# Altium PCB PCB.PcbDoc
Units mm, origin at the board's own origin, x right, y up, seen from the top; angles counter-clockwise.
Board outline 14.76 x 69.62 mm, 2 copper layers (Top Layer, Bottom Layer), stack 0.325 mm thick; 12 components, 11 nets, 44 pads, 0 vias.
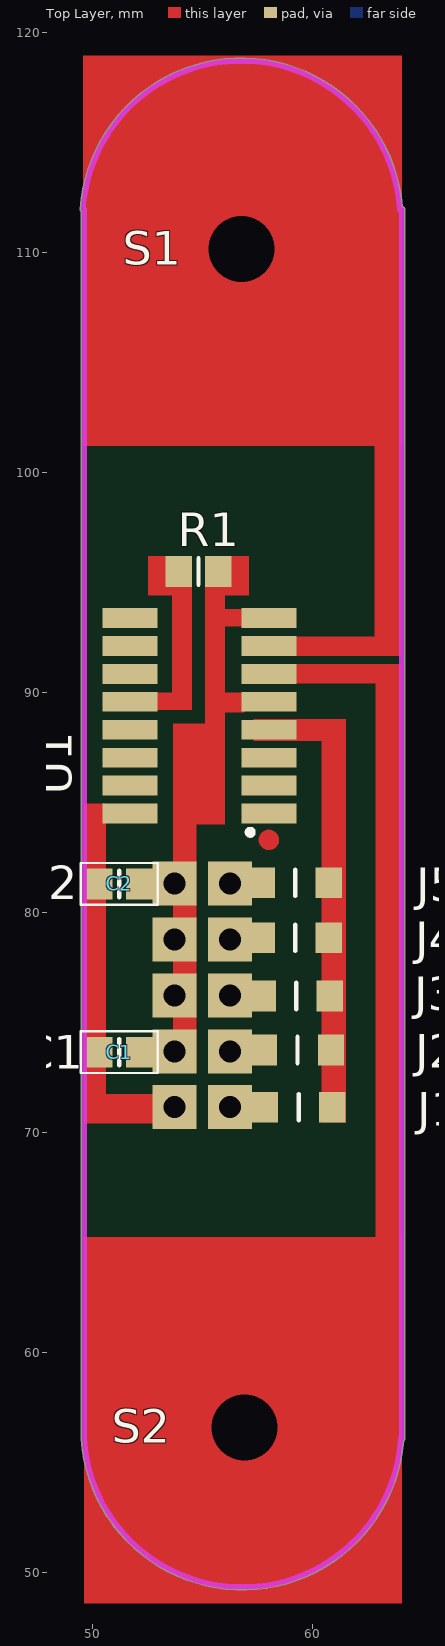
[diagram p0: Top Layer view]
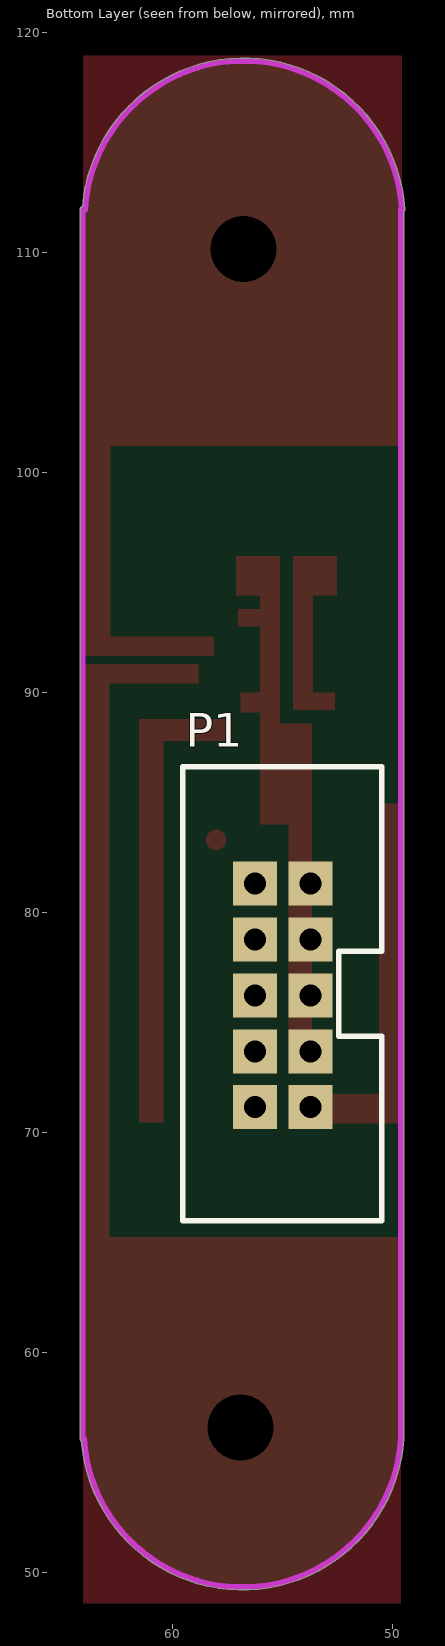
[diagram p1: Bottom Layer view, seen from below]

## Layer stack, top to bottom
Top Layer: signal copper 0.0356
Dielectric 1: core 0.254, FR-4, Dk 4.2
Bottom Layer: signal copper 0.0356

## Board outline
49.473,56.092 49.473,111.855 cw(c49.549,111.957) 49.422,111.965 cw(c56.749,111.491) 64.069,112.076 cw(c64.05,111.95) 64.177,111.95 64.177,56.091 cw(c64.05,56.091) 64.121,55.985 cw(c56.8,56.55) 49.473,56.076 cw(c49.6,56.084)

## Design rules (kind name [scope] priority, off if disabled: settings)
Clearance [All] p1: gap=0.254
PolygonConnect [All] p1: connectstyle=Relief reliefconductorwidth=0.254 reliefentries=4 polygonreliefangle="90 Angle" airgapwidth=0.254
RoutingVias [All] p1: holewidth=0.711 width=1.27 viastyle="Through Hole" minholewidth=0.711 minwidth=1.27 maxholewidth=0.711 maxwidth=1.27
SolderMaskExpansion [All] p1: expansion=0.102
Width [All] p1: maxlimit=0.254 minlimit=0.254 preferedwidth=0.254
30 further rules are at their usual default settings.

## Classes and differential pairs
component class CD4046: C1 C2 R1 U1
component class Top: J1 J2 J3 J4 J5 P1 S1 S2

## Components (designator, comment, footprint, x,y, rotation, side; value= is the part's Value field where it differs from the comment)
C1 "100nF" "C 0805 / 2012" 51.2,73.65 r0 top
C2 "1uF" "C 0805 / 2012" 51.2,81.3 r0 top
J1 "" "R 0805 / 2012 wide" 59.35,71.15 r0 top
J2 "" "R 0805 / 2012 wide" 59.3,73.75 r0 top
J3 "" "R 0805 / 2012 wide" 59.25,76.2 r0 top
J4 "" "R 0805 / 2012 wide" 59.2,78.85 r0 top
J5 "" "R 0805 / 2012 wide" 59.2,81.35 r0 top
P1 "Header 2x5" "Header 2x5 IDC-10S" 53.7,71.15 r0 bottom
R1 "190k / 170k / 150k / 130k / 110k" "R 0805 / 2012" 54.8,95.5 r0 top
S1 "Screw M3" "SCREW M3" 56.75,110.15 r0 top
S2 "Screw M3" "SCREW M3" 56.9,56.6 r0 top
U1 "CD4046" SOIC-16 54.8,86.4 r180 top

## Footprints (in the part's own frame and the unit in brackets; to place one, negate y for a bottom-side part, rotate by r counter-clockwise, add the part's x,y. Pads: shape width x height; smd on the part's side, far side on the other; paste and mask are expansions set on the pad)
"C 0805 / 2012" [mm] "Capacitor 0805 / 2012 (2.0 x 1.2 mm)"
  rect 1.2x1.4 smd: 1(-0.9,0) 2(0.9,0)
  silkscreen extent -1.75,-0.95 1.75,0.95, body extent -1,-0.62 1,0.62, height 0.78
"Header 2x5 IDC-10S" [mm]
  rect 2x2 hole 1: 1(0,0) 2(2.54,0) 3(0,-2.54) 4(2.54,-2.54) 5(0,-5.08) 6(2.54,-5.08) 7(0,-7.62) 8(2.54,-7.62) 9(0,-10.16) 10(2.54,-10.16)
  silkscreen extent -3.22,-15.48 5.8,5.16, body extent -3.23,-15.46 5.87,5.14, height 9.3
"R 0805 / 2012" [mm] "Resistor 0805 / 2012 (2.0 x 1.2 mm)"
  rect 1.2x1.4 smd: 1(-0.9,0) 2(0.9,0)
  silkscreen extent 0,-0.6 0,0.6, body extent -1,-0.62 1,0.62, height 0.45
"R 0805 / 2012 wide" [mm] "Resistor 0805 / 2012 (2.0 x 1.2 mm)"
  rect 1.2x1.4 smd: 1(-1.524,0) 2(1.524,0)
  silkscreen extent 0,-0.6 0,0.6, body extent -1,-0.62 1,0.62, height 0.45
"SCREW M3" [mm]
  round 0 hole 3: x(0,0)
SOIC-16 [mm]
  rect 2.5x0.9 smd: 1(-3.213,1.905) 2(-3.213,0.635) 3(-3.213,-0.635) 4(-3.213,-1.905) 5(-3.213,-3.175) 6(-3.213,-4.445) 7(-3.213,-5.715) 8(-3.213,-6.985) 9(3.113,-6.985) 10(3.113,-5.715) 11(3.113,-4.445) 12(3.113,-3.175) 13(3.113,-1.905) 14(3.113,-0.635) 15(3.113,0.635) 16(3.113,1.905)
  silkscreen extent -2.48,2.63 -2.23,2.88, body extent -3.03,-7.54 3.05,2.46, height 1.75

## Part data
C1 C2: library part Capacitor
J1 J2 J3 J4 J5 R1: library part Resistor
U1: "PLL / VCO"

## Nets (pads, with @x,y where several pads share a name; then routed paths per layer and width w, separated by ;. In a path a pad name is that pad's centre, name@x,y a point inside that pad or via, vN(x,y) a via of type N, cw(c..) or ccw(c..) an arc to the next point about the centre after c; other vN are vias at no path point)
3V3: C1.1 C2.1 P1.1 U1.16
CAPACITOR-A: U1.6
CAPACITOR-B: U1.7
FREQUENCY-OUT: J1.2 J2.2 J3.2 J4.2 J5.2 U1.4
GND: C1.2 C2.2 P1.3 P1.5 P1.7 P1.9 R1.2 U1.5 U1.8
NetJ1_1: J1.1 P1.2
NetJ2_1: J2.1 P1.4
NetJ3_1: J3.1 P1.6
NetJ4_1: J4.1 P1.8
NetJ5_1: J5.1 P1.10
NetR1_1: R1.1 U1.12
pads on no net: S1.x S2.x U1.1 U1.2 U1.3 U1.9 U1.10 U1.11 U1.13 U1.14 U1.15
copper on no net: | length 1.3
  Top Layer w0.5: 58.212,83.3 ccw(c58,83.3) 58.212,83.3

## Keep-outs
Keep-Out Layer:
  lines w0.254: 49.549,111.957 cw(c56.749,111.491) 63.95,111.95 ; 49.6,111.957 49.6,56.084 ccw(c56.8,56.55) 64.001,56.091 64.05,56.091 64.05,111.95

## Other copper
Top Layer:
  rectangle net CAPACITOR-A: 49.6,48.6 64.05,65.25
  rectangle net CAPACITOR-B: 49.55,101.2 64.05,118.95
  rectangle net 3V3: 50.6,70.4 53.05,71.75
  rectangle net 3V3: 49.6,70.4 50.6,84.95
  rectangle net GND: 54.7,84 55.1,88.6
  rectangle net GND: 53.65,72.7 54.7,88.6
  rectangle net GND: 55.4,93 57,93.8
  rectangle net GND: 55.6,89.1 56.9,90
  rectangle net GND: 55.1,84 56,95.1
  rectangle net NetR1_1: 52.6,89.2 53.6,90
  rectangle net NetR1_1: 53.6,89.2 54.5,96.1
  rectangle net FREQUENCY-OUT: 57.3,87.8 60.7,88.8
  rectangle net FREQUENCY-OUT: 60.4,70.45 61.5,88.8
  rectangle net CAPACITOR-A: 58.8,90.4 63,91.3
  rectangle net GND: 55.1,94.4 57.1,96.2
  rectangle net NetR1_1: 52.5,94.4 54.5,96.2
  rectangle net CAPACITOR-B: 58.1,91.65 62.9,92.55
  rectangle net CAPACITOR-B: 62.8,91.65 64,104.2
  rectangle net CAPACITOR-A: 62.85,62.5 64,91.3